# Altium PCB SThuMb32.PcbDoc
Units mm, origin at the board's own origin, x right, y up, seen from the top; angles counter-clockwise.
Board outline 40.36 x 22.86 mm, 4 copper layers (Top Layer, GND, PWR, Bottom Layer), stack 0.603 mm thick; 23 components, 43 nets, 126 pads, 29 vias.
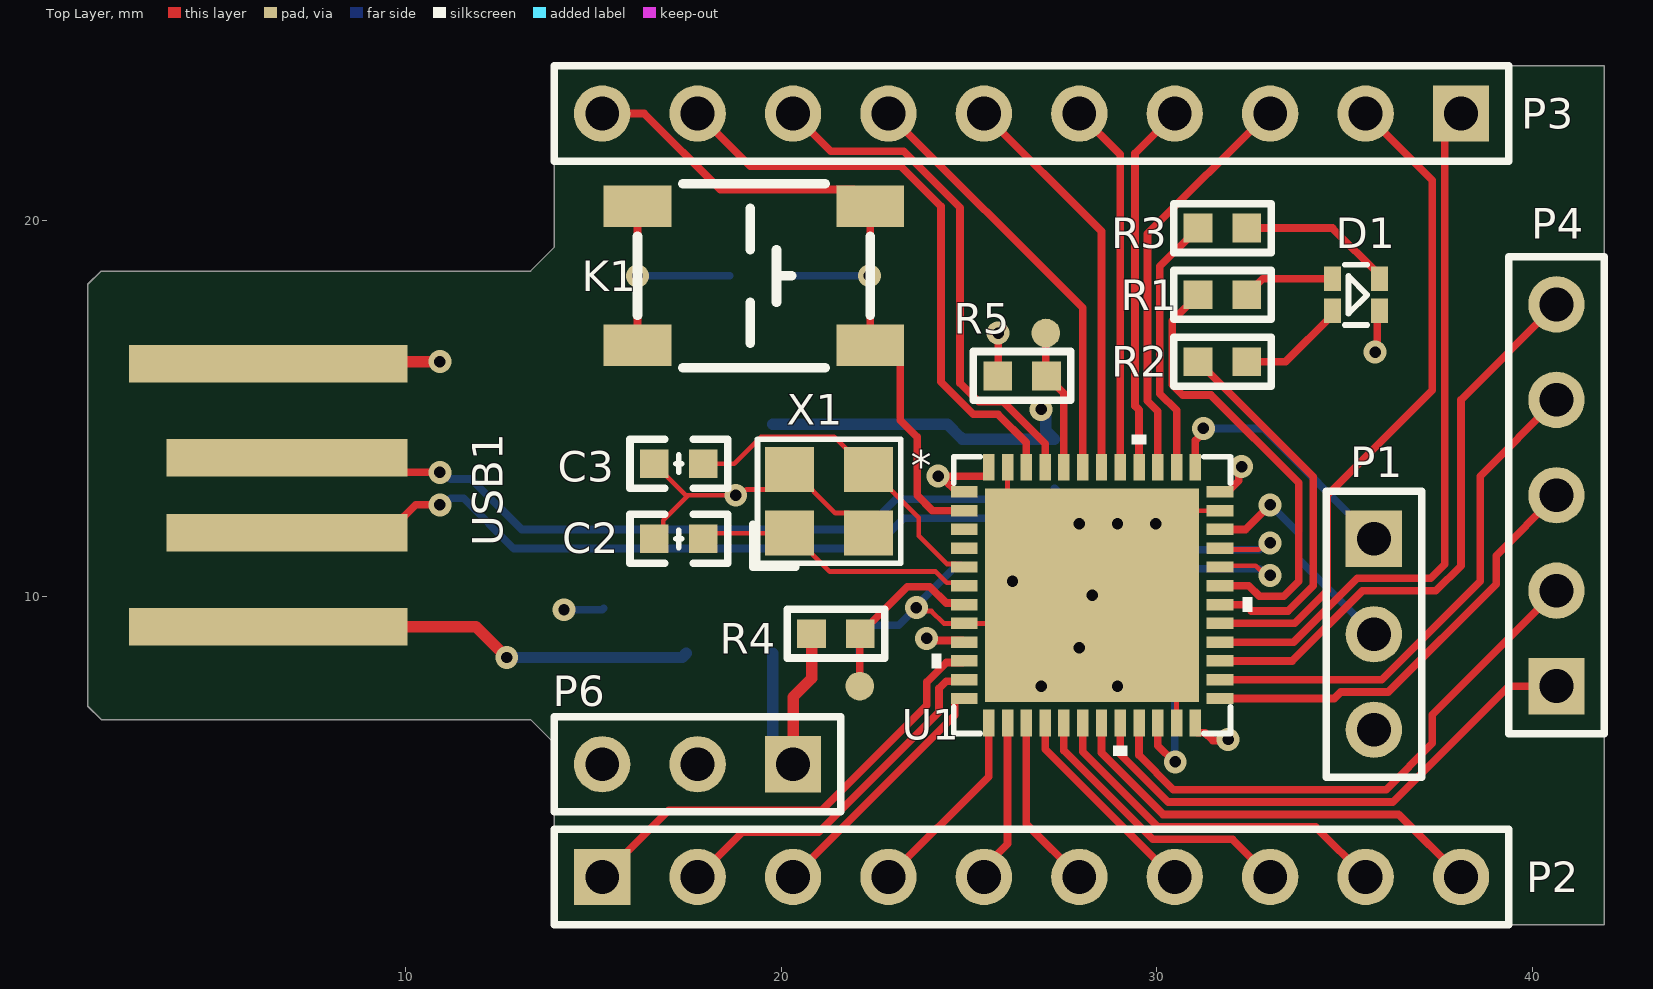
[diagram p0: Top Layer view]
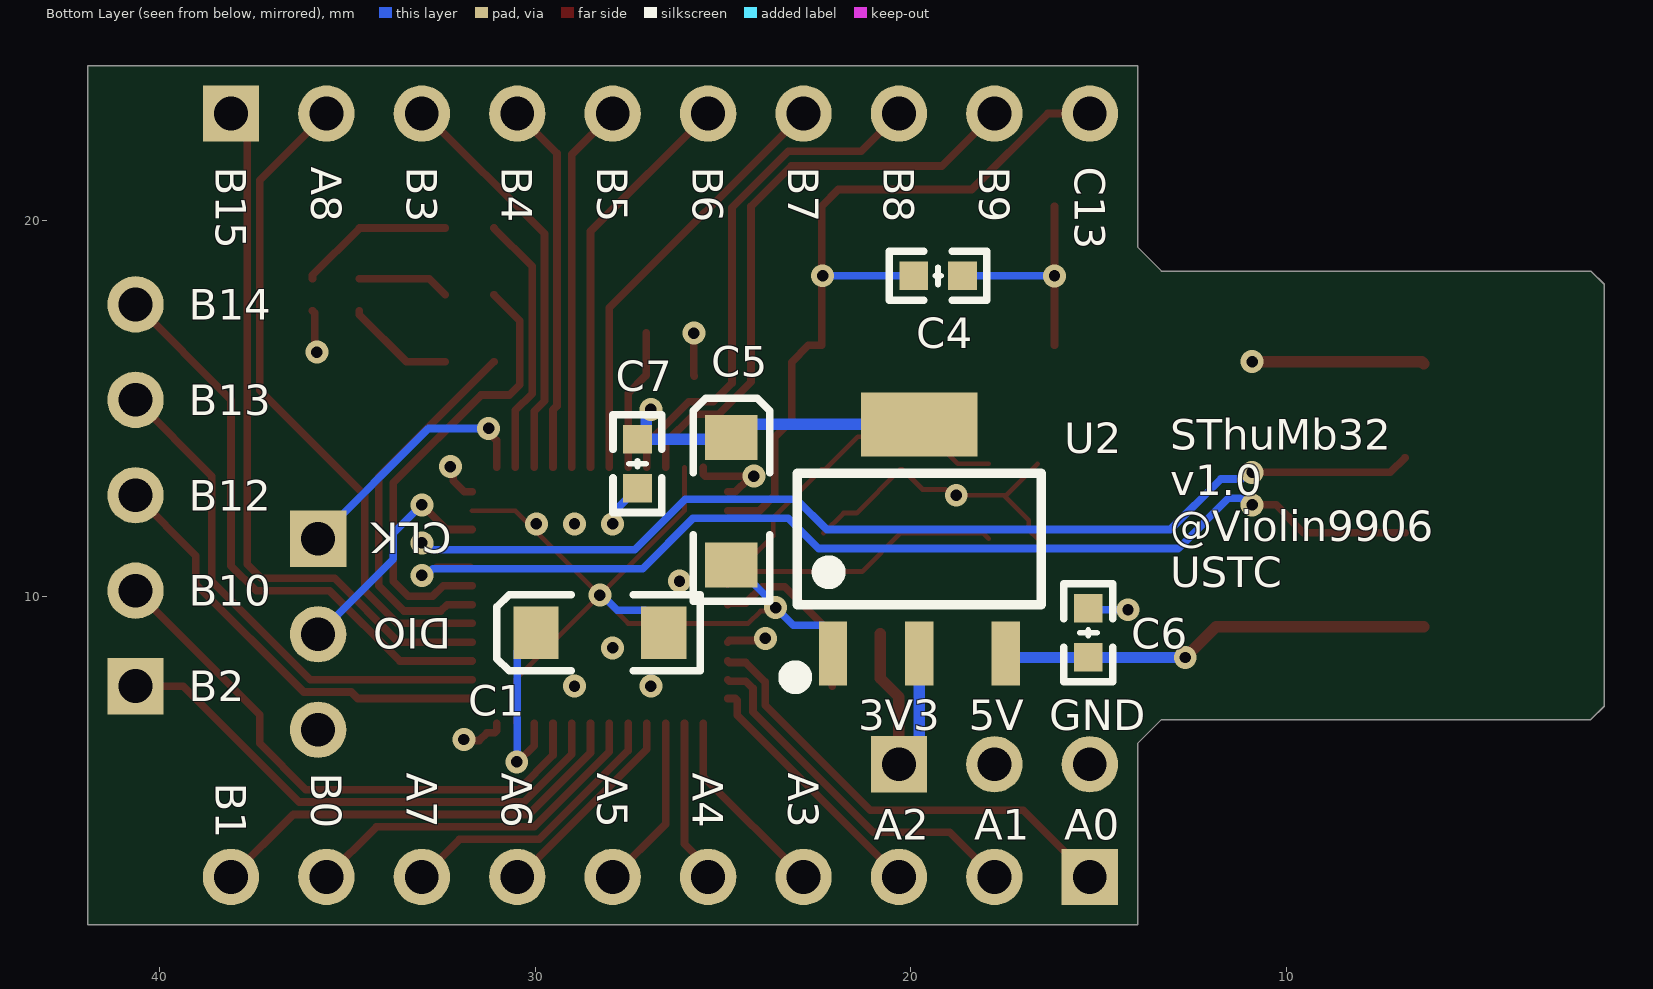
[diagram p1: Bottom Layer view, seen from below]
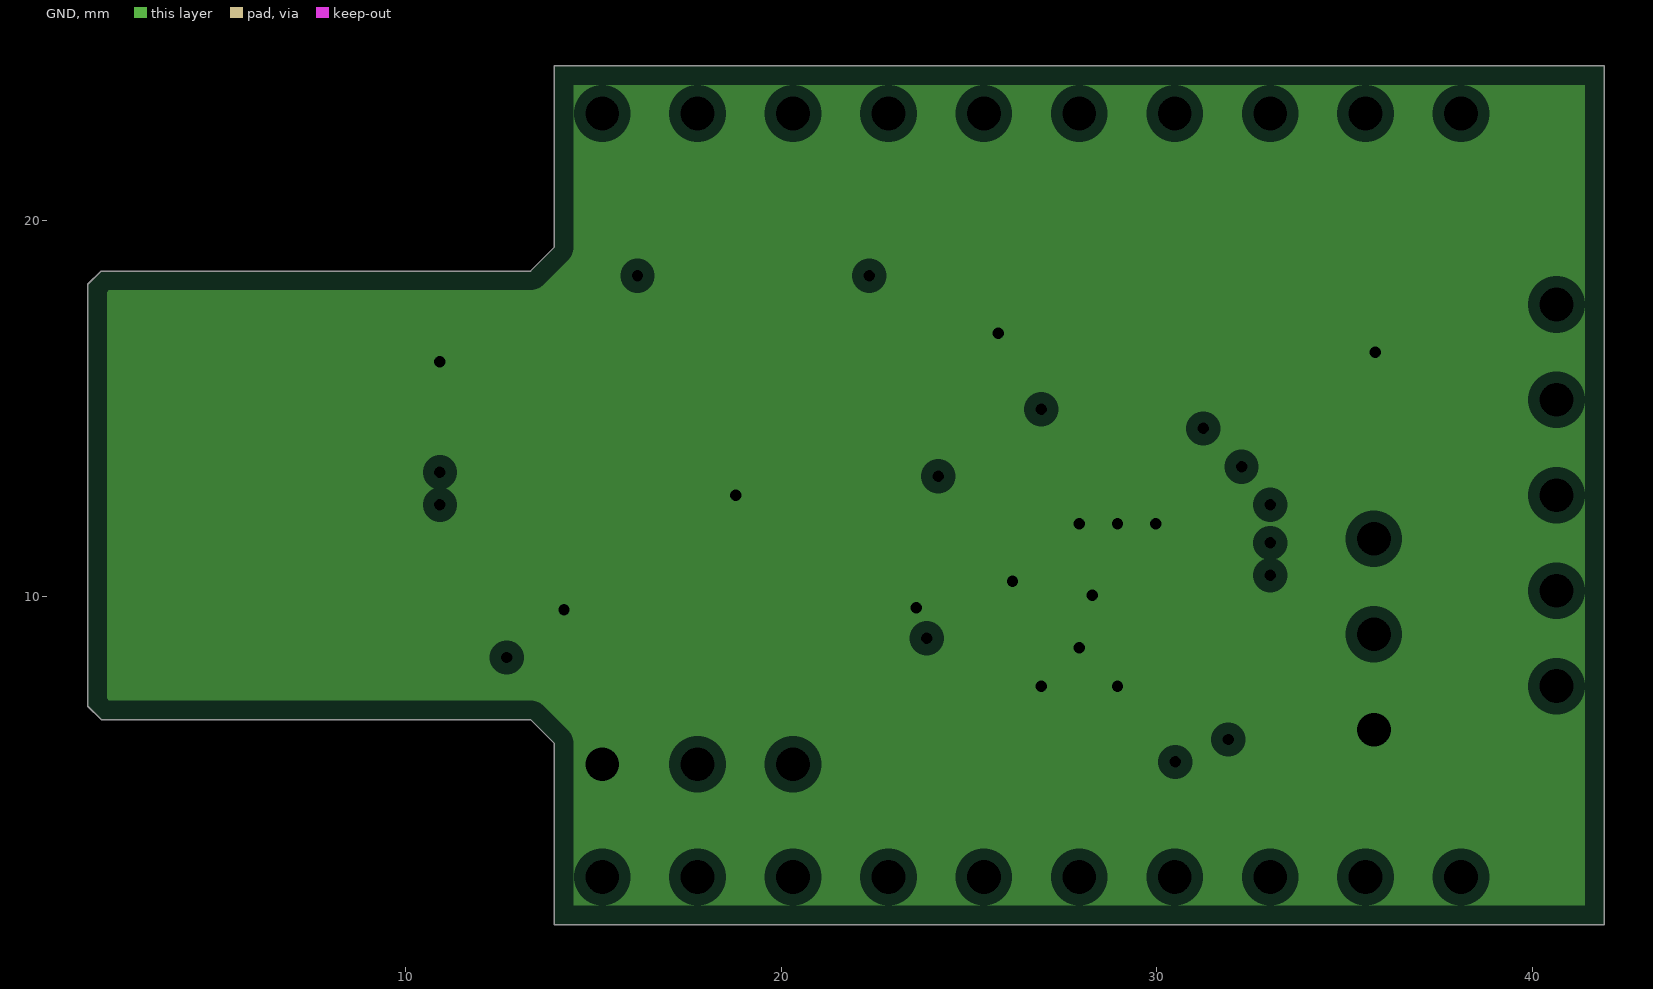
[diagram p2: GND, clearances drawn from the general rule]
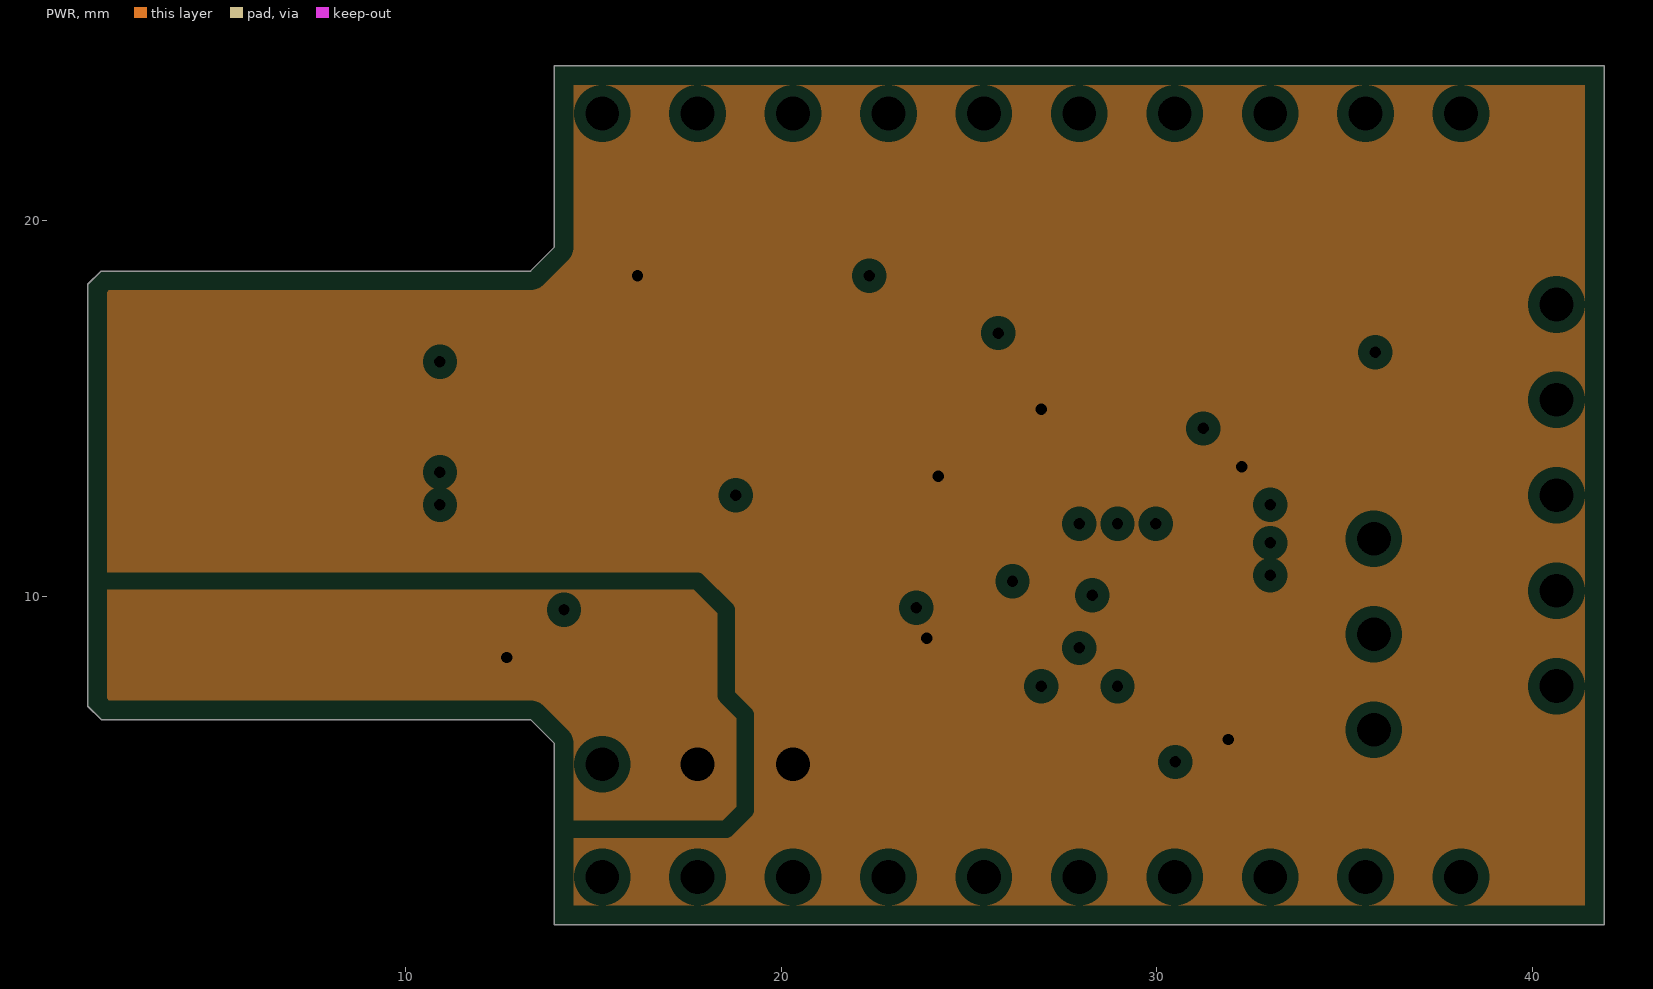
[diagram p3: PWR, clearances drawn from the general rule]
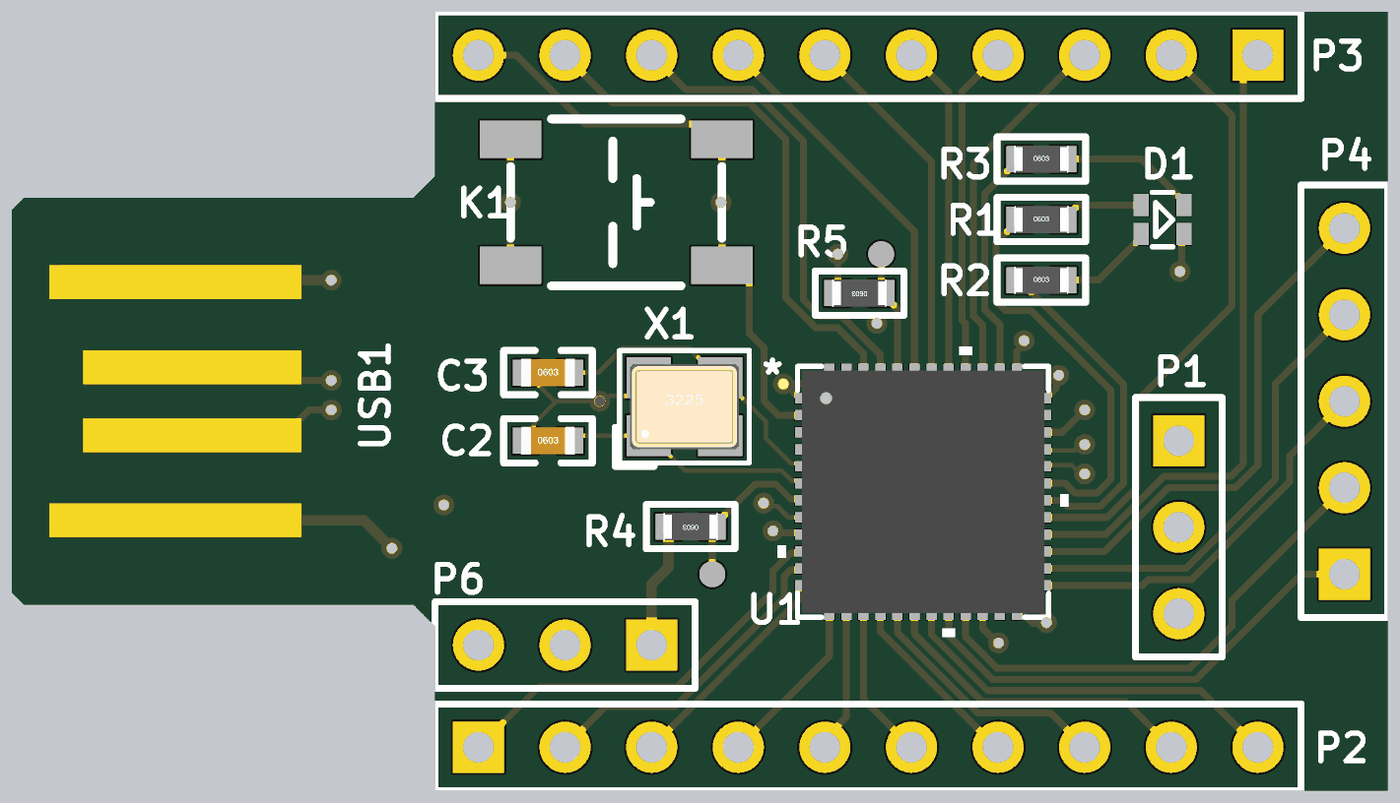
[diagram p4: 3D render of the assembled board from above, using the file's embedded part models]
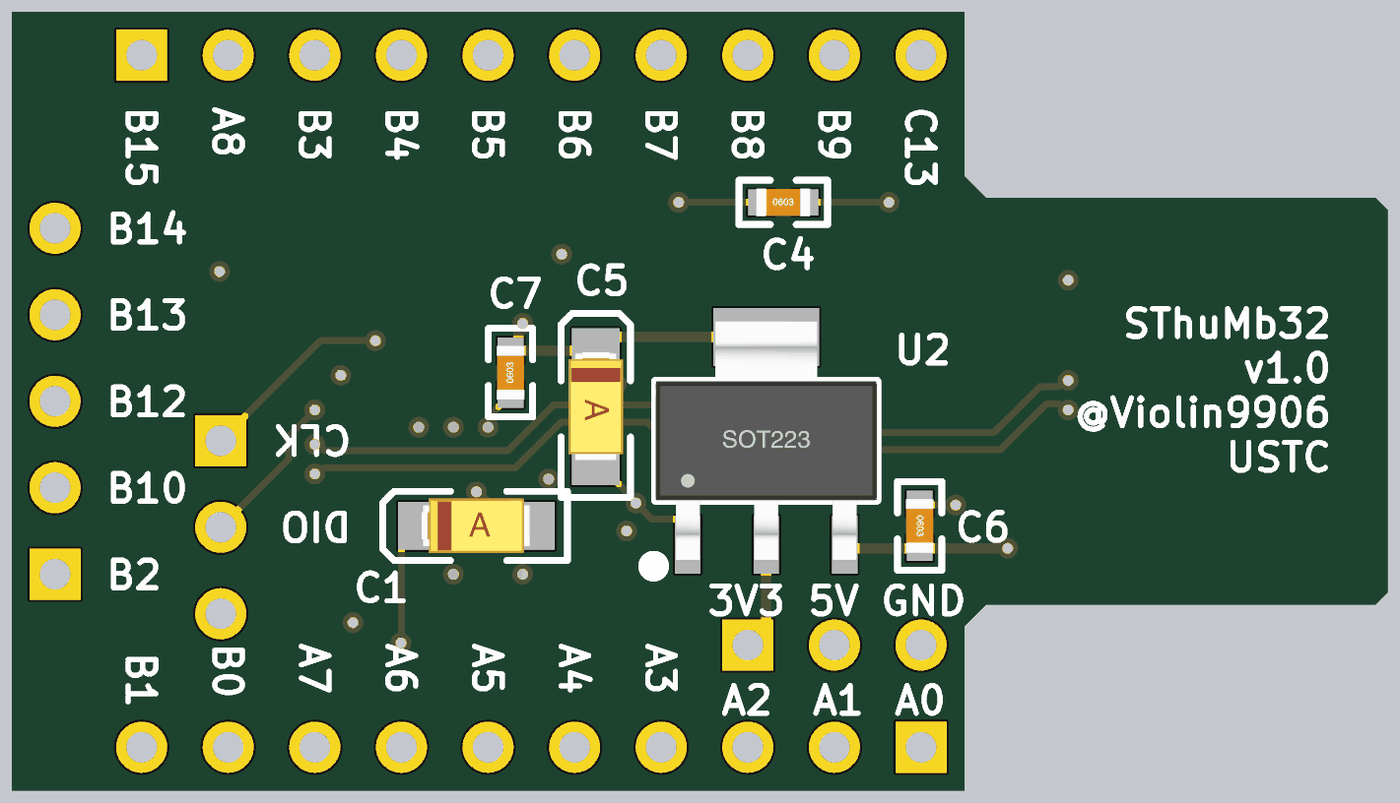
[diagram p5: 3D render of the assembled board from below, using the file's embedded part models]

## Layer stack, top to bottom
Top Solder: solder mask 0.0102, Solder Resist, Dk 3.5
Top Layer: signal copper 0.0356
Dielectric 2: prepreg 0.0711, PP-006, Dk 4.1
GND: plane copper 0.035, net GND
Dielectric 1: dielectric 0.32, FR-4, Dk 4.8
PWR: plane copper 0.035, net (Multiple Nets)
Dielectric 3: prepreg 0.0711, PP-006, Dk 4.1
Bottom Layer: signal copper 0.0356
Bottom Solder: solder mask 0.0102, Solder Resist, Dk 3.5

## Board outline
1.55,7.086 1.55,18.314 1.905,18.669 13.335,18.669 13.97,19.304 13.97,24.13 41.91,24.13 41.91,1.27 13.97,1.27 13.97,6.096 13.335,6.731 1.905,6.731

## Design rules (kind name [scope] priority, off if disabled: settings)
BoardOutlineClearance [All] p1: gap=0.2 ignorepadtopadclearanceinfootprint=FALSE
Clearance [All] p1: gap=0.254 ignorepadtopadclearanceinfootprint=TRUE except(0.127: Arc-Arc Arc-Track Track-Track; 0.152: Arc-THPad Arc-Via Track-THPad Track-Via SMDPad-Via THPad-THPad THPad-Via Via-Via Via-Fill Via-Poly Via-Region; 0.203: Arc-SMDPad Track-SMDPad SMDPad-SMDPad SMDPad-THPad SMDPad-Text; 0.508: Fill-Text Poly-Text Region-Text)
DiffPairsRouting [All] p1: maxlimit=0.305 minlimit=0.254 mostfreqgap=0.305 toplayer_minwidth=0.127 toplayer_maxwidth=0.381 toplayer_prefwidth=0.203 bottomlayer_minwidth=0.127 bottomlayer_maxwidth=0.381 bottomlayer_prefwidth=0.203 maxuncoupledlength=12.7
HoleToHoleClearance [All] p1: gap=0.305 allowstackedmicrovias=TRUE
MinimumSolderMaskSliver [All] p1: minsoldermaskwidth=0.076
PlaneClearance [All] p1: clearance=0.305
PlaneConnect [All] p1: pad.planeconnectstyle=Relief pad.reliefexpansion=0.508 pad.reliefentries=4 pad.reliefconductorwidth=0.254 pad.reliefairgap=0.254 via.planeconnectstyle=Direct via.reliefexpansion=0.508 via.reliefentries=4 via.reliefconductorwidth=0.254 via.reliefairgap=0.254
PolygonConnect [All] p1: thpad.connectstyle=Relief thpad.reliefconductorwidth=0.381 thpad.reliefentries=4 thpad.polygonreliefangle="90 Angle" thpad.airgapwidth=0.254 smdpad.connectstyle=Relief smdpad.reliefconductorwidth=0.254 smdpad.reliefentries=4 smdpad.polygonreliefangle="90 Angle" smdpad.airgapwidth=0.254 via.connectstyle=Direct via.reliefconductorwidth=0.254 via.reliefentries=4 via.polygonreliefangle="90 Angle" via.airgapwidth=0.254
RoutingVias [All] p1: holewidth=0.305 width=0.61 viastyle="Through Hole" minholewidth=0.305 minwidth=0.61 maxholewidth=0.711 maxwidth=1.27
SilkToSilkClearance [All] p1: silktosilkclearance=0.102
SilkToSolderMaskClearance [IsPad] p1: minsilkscreentomaskgap=0.089 clearancetoexposedcopper=TRUE
SolderMaskExpansion [All] p1: expansion=0.064 istentingtop=FALSE
UnRoutedNet [All] p1: checkbadconnections=TRUE
Width [All] p1: maxlimit=0.305 minlimit=0.127 preferedwidth=0.254
22 further rules are at their usual default settings.

## Classes and differential pairs
differential pair USB: +USB_P -USB_N

## Components (designator, comment, footprint, x,y, rotation, side; value= is the part's Value field where it differs from the comment)
C1 "4.7uF" "CD A(3216)" 28.28,9.04 r180 bottom
C2 "22pF" "C 0603_L" 17.28,11.54 r0 top
C3 "22pF" "C 0603_L" 17.28,13.54 r0 top
C4 "100nF" "C 0603_L" 19.28,18.54 r180 bottom
C5 "10uF" "CD A(3216)" 24.78,12.54 r270 bottom
C6 "2.2uF" "C 0603_L" 15.28,9.04 r270 bottom
C7 "100nF" "C 0603_L" 27.28,13.54 r90 bottom
D1 "LED_RGB" LED_RGB_0606 35.306,18.034 r180 top
K1 "Key" KEY_4X4_4P 19.28,18.54 r180 top
P1 "Header 3" HDR1X3 35.78,11.54 r270 top
P2 "Header 10" HDR1X10 15.24,2.54 r0 top
P3 "Header 10" HDR1X10 38.1,22.86 r180 top
P4 "Header 5" HDR1X5 40.64,7.62 r90 top
P6 "Header 3" HDR1X3 20.32,5.54 r180 top
R1 "4.7K" "R 0603_L" 31.75,18.034 r0 top
R2 "10K" "R 0603_L" 31.75,16.256 r0 top
R3 "4.7K" "R 0603_L" 31.75,19.812 r0 top
R4 "100K" "R 0603_L" 21.463,9.017 r180 top
R5 "100K" "R 0603_L" 26.416,15.875 r180 top
U1 "STM32F401CE" UFQFPN-48_7X7_L 28.28,10.04 r0 top value=Value
U2 "AMS1117-3V3" SOT223_L 19.78,11.54 r180 bottom
USB1 "USB_4P" USB_A_MALE 6.35,12.7 r90 top
X1 "25MHz" "OSC 3225-4P" 21.28,12.54 r0 top

## Footprints (in the part's own frame and the unit in brackets; to place one, negate y for a bottom-side part, rotate by r counter-clockwise, add the part's x,y. Pads: shape width x height; smd on the part's side, far side on the other; paste and mask are expansions set on the pad)
"C 0603_L" [mil] "无极性贴片电容                                       淘宝ID:黄晶宝石"
  rect 30x30 smd: 1(-25.59,0) 2(25.59,0)
  silkscreen extent -51,-26 51,26, body extent -31,-16 31,16, height 32
"CD A(3216)" [mm] "长3.2mm，宽1.6mm，厚1.6mm      淘宝ID:黄晶宝石"
  rect 1.2x1.4 smd: 1(-1.7,0) 2(1.7,0)
  silkscreen extent -2.74,-1.02 2.67,1.02, body extent -1.6,-0.8 1.6,0.8, height 1.6
HDR1X3 [mm] "Connector; Header; 3 Position"
  rect 1.5x1.5 hole 0.9: 1(0,0)
  round 1.5 hole 0.9: 2(2.54,0) 3(5.08,0)
  silkscreen extent -1.27,-1.27 6.35,1.27
HDR1X5 [mm] "Connector; Header; 5 Position"
  rect 1.5x1.5 hole 0.9: 1(0,0)
  round 1.5 hole 0.9: 2(2.54,0) 3(5.08,0) 4(7.62,0) 5(10.16,0)
  silkscreen extent -1.27,-1.27 11.43,1.27
HDR1X10 [mm] "Connector; Header; 10 Position"
  rect 1.5x1.5 hole 0.9: 1(0,0)
  round 1.5 hole 0.9: 2(2.54,0) 3(5.08,0) 4(7.62,0) 5(10.16,0) 6(12.7,0) 7(15.24,0) 8(17.78,0) 9(20.32,0) 10(22.86,0)
  silkscreen extent -1.27,-1.27 24.13,1.27
KEY_4X4_4P [mm]
  rect 1.8x1.1 smd: 1(-3.1,1.85) 2(3.1,1.85) 3(-3.1,-1.85) 4(3.1,-1.85)
  silkscreen extent -3.1,-2.45 3.1,2.45
LED_RGB_0606 [mm]
  rect 0.45x0.65 smd mask+0.025: 1(-0.625,0.425) 2(0.625,0.425) 3(-0.625,-0.425) 4(0.625,-0.425)
  silkscreen extent -0.3,-0.8 0.3,0.8, body extent -0.65,-0.7 0.65,0.7, height 0.6
"OSC 3225-4P" [mm] "3.2*2.5*0.7mm(长宽高)                         淘宝ID:黄晶宝石"
  rect 1.3x1.2 smd: 1(-1.05,-0.85) 2(1.05,-0.85) 3(1.05,0.85) 4(-1.05,0.85)
  silkscreen extent -2.03,-1.75 1.91,1.65, body extent -1.6,-1.25 1.6,1.25, height 0.7
"R 0603_L" [mil] "1/10W贴片电阻                 淘宝ID:黄晶宝石"
  rect 30x30 smd: 1(-25.59,0) 2(25.59,0)
  silkscreen extent -51,-26 51,26, body extent -31,-16 32,16, height 16
SOT223_L [mm] "6.4x7x1.6mm(长宽高)"
  rect 0.75x1.7 smd: 1(-2.3,-3.048) 2(0,-3.048) 3(2.3,-3.048)
  rect 3.1x1.7 smd: 2(0,3.048)
  silkscreen extent -3.5,-3.88 3.25,1.75, body extent -3.25,-3.51 3.25,3.51, height 1.65
UFQFPN-48_7X7_L [mil]
  rect 28x12 smd mask+1: 1(-134,108.27) 2(-134,88.58) 3(-134,68.9) 4(-134,49.21) 5(-134,29.53) 6(-134,9.84) 7(-134,-9.84) 8(-134,-29.53) 9(-134,-49.21) 10(-134,-68.9) 11(-134,-88.58) 12(-134,-108.27) 25(134,-108.27) 26(134,-88.58) 27(134,-68.9) 28(134,-49.21) 29(134,-29.53) 30(134,-9.84) 31(134,9.84) 32(134,29.53) 33(134,49.21) 34(134,68.9) 35(134,88.58) 36(134,108.27)
  rect 12x28 smd mask+1: 13(-108.27,-134) 14(-88.58,-134) 15(-68.9,-134) 16(-49.21,-134) 17(-29.53,-134) 18(-9.84,-134) 19(9.84,-134) 20(29.53,-134) 21(49.21,-134) 22(68.9,-134) 23(88.58,-134) 24(108.27,-134) 37(108.27,134) 38(88.58,134) 39(68.9,134) 40(49.21,134) 41(29.53,134) 42(9.84,134) 43(-9.84,134) 44(-29.53,134) 45(-49.21,134) 46(-68.9,134) 47(-88.58,134) 48(-108.27,134)
  rect 224x224 smd paste-111.5 mask+1: 49(0,0)
  silkscreen extent -168,-168 168,168, body extent -140,-140 140,140, height 24
USB_A_MALE [mm]
  rect 1x7.41 smd paste-100 mask+0: 1(-3.5,0) 4(3.5,0)
  rect 1x6.41 smd paste-100 mask+0: 2(-1,-0.5) 3(1,-0.5)

## Part data
C1 C5: library part CT, "贴片钽电容", BOM名称=贴片钽电容, 淘宝ID="封装库来自淘宝 ID：黄晶宝石", 联系售后=https://shop463601444.taobao.com
C2 C3 C4 C6 C7: library part C, "贴片电容", BOM名称=无极性贴片电容, 唯一出售店铺网址=https://shop463601444.taobao.com, 淘宝ID="封装库来自淘宝 ID：黄晶宝石", 联系售后，技术支持=https://shop463601444.taobao.com
K1: library part Key_4P
P1 P6: "Header, 3-Pin", LatestRevisionDate=17-Jul-2002, LatestRevisionNote="Re-released for DXP Platform.", Publisher="Altium Limited"
P2 P3: "Header, 10-Pin", LatestRevisionDate=17-Jul-2002, LatestRevisionNote="Re-released for DXP Platform.", Publisher="Altium Limited"
P4: "Header, 5-Pin", LatestRevisionDate=17-Jul-2002, LatestRevisionNote="Re-released for DXP Platform.", Publisher="Altium Limited"
R1 R2 R3 R4 R5: library part R, "贴片电阻", BOM名称=贴片电阻, 封装库来自淘宝卖家 ID：黄晶宝石=其他店铺购入均为盗版，不享受售后技术支持服务，请立即申请退款, 版权归属="来自淘宝 ID：黄晶宝石", 联系售后=https://shop463601444.taobao.com
U1: "带DSP和FPU的高性能基本型系列ARM Cortex-M4 MCU，具有512 KB Flash、84 MHz CPU和ART加速器", Manufacturer_Part_Number=stm32f4xxc1, Copyright="Copyright (C) 2016 Accelerated Designs. All rights reserved", RefDes=RefDes, Type=DEV, Vendor=STMicroelectronics
U2: library part AMS1117, "三端稳压芯片", BOM名称=稳压芯片, 欢迎光临淘宝店铺=https://shop463601444.taobao.com, 淘宝ID="封装库来自淘宝 ID：黄晶宝石"
X1: library part XTAL-4P, "4脚无源晶振", BOM名称=4脚无源晶振, 学习资源=https://shop463601444.taobao.com, 版权归属="封装库来自淘宝卖家 ID：黄晶宝石"

## Free pads (board coordinates)
  round 0.762 smd: ""(22.098,7.62) ""(27.051,17.018)

## Via types
v1: diameter 0.61, hole 0.305, Top Layer to Bottom Layer, tented both sides, 29 vias

## Nets (pads, with @x,y where several pads share a name; then routed paths per layer and width w, separated by ;. In a path a pad name is that pad's centre, name@x,y a point inside that pad or via, vN(x,y) a via of type N, cw(c..) or ccw(c..) an arc to the next point about the centre after c; other vN are vias at no path point)
+5: C6.2 P6.2 U2.3 USB1.1 | length 11.5
  Top Layer w0.305: USB1.1 11.882,9.2 v1(12.7,8.382)
  Bottom Layer w0.305: v1(12.7,8.382) 17.37,8.382 U2.3
A0: P2.1 U1.10 | length 12.4
  Top Layer w0.203: P2.1 17.018,4.318 21.082,4.318 23.876,7.112 23.876,7.729 24.395,8.247 24.834,8.247 U1.10
A1: P2.2 U1.11 | length 9.6
  Top Layer w0.203: P2.2 18.974,3.734 21.006,3.734 24.206,6.934 24.206,7.559 24.395,7.747 24.834,7.747 U1.11
A2: P2.3 U1.12 | length 6.8
  Top Layer w0.203: P2.3 24.622,6.842 24.622,7.239 24.673,7.29 U1.12
A3: P2.4 U1.13 | length 5.2
  Top Layer w0.203: P2.4 25.53,5.21 U1.13
A4: P2.5 U1.14 | length 4.4
  Top Layer w0.203: P2.5 25.4,2.794 26.03,3.424 U1.14
A5: P2.6 U1.15 | length 4.7
  Top Layer w0.203: U1.15 26.53,3.95 P2.6
A6: P2.7 U1.16 | length 5.6
  Top Layer w0.203: U1.16 27.03,5.941 30.431,2.54 P2.7
A7: P2.8 U1.17 | length 7.6
  Top Layer w0.203: U1.17 27.53,5.908 29.894,3.544 32.016,3.544 P2.8
A8: P3.2 U1.29 | length 17.8
  Top Layer w0.203: U1.29 33.674,9.29 34.544,10.16 34.544,12.7 37.338,15.494 37.338,21.082 P3.2
B0: P2.9 U1.18 | length 9.7
  Top Layer w0.203: U1.18 28.03,5.875 30.031,3.874 34.226,3.874 P2.9
B1: P2.10 U1.19 | length 11.7
  Top Layer w0.203: U1.19 28.53,5.842 30.168,4.204 36.436,4.204 P2.10
B2: P4.1 U1.20 | length 14.2
  Top Layer w0.203: U1.20 29.03,5.809 30.304,4.535 36.285,4.535 39.37,7.62 P4.1
B3: P3.3 U1.39 | length 10.9
  Top Layer w0.203: U1.39 30.03,14.936 29.754,15.212 29.754,19.659 32.955,22.86 P3.3
B4: P3.4 U1.40 | length 9.9
  Top Layer w0.203: U1.40 29.53,14.969 29.424,15.076 29.424,21.804 P3.4
B5: P3.5 U1.41 | length 9.9
  Top Layer w0.203: P3.5 29.03,21.77 U1.41
B6: P3.6 U1.42 | length 10.7
  Top Layer w0.203: P3.6 28.53,19.73 U1.42
B7: P3.7 U1.43 | length 11.6
  Top Layer w0.203: P3.7 28.03,17.69 U1.43
B8: P3.8 U1.45 | length 13.7
  Top Layer w0.203: P3.8 21.324,21.856 23.262,21.856 24.765,20.353 24.765,15.683 25.259,15.189 25.912,15.189 27.03,14.071 U1.45
B9: P3.9 U1.46 | length 15.8
  Top Layer w0.203: P3.9 19.177,21.463 23.188,21.463 24.257,20.394 24.257,15.724 25.122,14.859 25.775,14.859 26.53,14.104 U1.46
B10: P4.2 U1.21 | length 15
  Top Layer w0.203: U1.21 29.53,5.776 30.441,4.865 36.107,4.865 37.338,6.096 37.338,6.858 P4.2
B12: P4.3 U1.25 | length 11.6
  Top Layer w0.203: U1.25 34.722,7.29 34.896,7.464 36.166,7.464 39.035,10.333 39.035,11.095 P4.3
B13: P4.4 U1.26 | length 13.7
  Top Layer w0.203: U1.26 33.964,7.79 33.968,7.794 35.994,7.794 38.608,10.408 38.608,13.208 P4.4
B14: P4.5 U1.27 | length 15.5
  Top Layer w0.203: U1.27 33.608,8.29 35.478,10.16 37.432,10.16 38.1,10.828 38.1,15.24 P4.5
B15: P3.1 U1.28 | length 19
  Top Layer w0.203: U1.28 33.641,8.79 35.341,10.49 37.295,10.49 37.668,10.863 37.668,22.428 P3.1
BT0: pad.@27.051,17.018 R5.1 U1.44 | length 3.8
  Top Layer w0.203: pad.@27.051,17.018 27.051,15.89 R5.1 27.53,15.411 U1.44
BTN: C4.1 K1.1 K1.3 P3.10 U1.2 | length 20.7
  Top Layer w0.203: P3.10 16.36,22.86 18.382,20.838 21.932,20.838 K1.3 v1@22.38,18.795 ; v1(22.352,18.542) 22.352,18.767 v1@22.38,18.795 ; U1.2 24.032,12.29 23.622,12.7 23.622,14.249 23.178,14.693 23.178,16.242 22.73,16.69 K1.1 v1@22.38,18.795
  Bottom Layer w0.203: C4.1 22.35,18.54 v1(22.352,18.542)
GND: C1.2 C2.1 C3.1 C5.2 C6.1 C7.1 D1.1 P1.3 P6.3 R5.2 U1.8 U1.23 U1.35 U1.47 U1.49 U2.1 USB1.4 X1.2 X1.4 | length 42.1
  Top Layer w0.127: C2.1 16.863,11.773 16.863,12.037 17.526,12.7 ; C3.1 17.47,12.7 v1(18.796,12.7) 18.927,12.7 19.08,12.853 19.693,12.853 X1.4 20.28,13.39 21.443,12.227 21.793,12.227 X1.2 ; v1(23.603,9.709) 23.695,9.617 24.003,9.617 24.33,9.29 U1.8 27.53,9.29 v1(28.28,10.04) ; U1.47 26.03,12.29 v1(28.28,10.04) ; U1.23 30.53,7.79 v1(28.28,10.04) ; U1.35 30.53,12.29 v1(28.28,10.04)
  Top Layer w0.203: R5.2 25.781,15.89 v1(25.781,17.018) ; v1(35.814,16.51) 35.872,16.568 35.872,17.55 D1.1
  Top Layer w0.305: USB1.4 6.406,16.256 v1(10.922,16.256)
  Bottom Layer w0.203: v1(14.224,9.652) 15.242,9.652 C6.1 ; U2.1 22.08,8.967 22.353,9.24 23.134,9.24 v1(23.603,9.709) 23.603,9.763 24.68,10.84 C5.2 ; C1.2 26.58,9.14 27.078,9.638 27.819,9.638 28.221,10.04 v1(28.28,10.04) ; C7.1 27.862,12.308 27.862,12.016 v1(27.94,11.938)
  other v1: 26.924,7.62 28.956,7.62 27.94,8.636 26.162,10.414 28.956,11.938 29.972,11.938
LED_B: R1.1 U1.31 | length 12.1
  Top Layer w0.203: R1.1 30.414,17.348 30.414,15.644 30.692,15.367 31.445,15.367 33.782,13.03 33.782,10.414 33.376,10.008 32.736,10.008 32.453,10.29 U1.31
LED_G: R3.1 U1.38 | length 7
  Top Layer w0.203: U1.38 30.53,14.957 30.084,15.404 30.084,18.796 R3.1
LED_R: R2.1 U1.30 | length 10.1
  Top Layer w0.203: R2.1 34.163,13.193 34.163,10.287 33.496,9.62 32.512,9.62 32.344,9.788 31.685,9.788 U1.30
NetC1_1: C1.1 U1.22 | length 4.9
  Top Layer w0.203: U1.22 30.03,6.038 30.466,5.602 v1(30.494,5.602)
  Bottom Layer w0.203: C1.1 30.478,8.542 30.478,5.618 v1(30.494,5.602)
NetC2_2: C2.2 U1.6 X1.1 | length 7.6
  Top Layer w0.127: C2.2 18.08,11.69 X1.1 20.28,11.69 21.302,10.668 24.113,10.668 24.41,10.371 24.795,10.371 U1.6
NetC3_2: C3.2 U1.5 X1.3 | length 9
  Top Layer w0.127: C3.2 18.753,13.54 19.47,14.257 21.413,14.257 22.28,13.39 X1.3 22.38,13.39 23.663,12.107 23.663,11.618 24.41,10.871 24.796,10.871 U1.5
NetD1_2: D1.2 R2.2 | length 2.9
  Top Layer w0.203: R2.2 33.428,16.256 34.681,17.509 D1.2
NetD1_3: D1.3 R3.2 | length 4.2
  Top Layer w0.203: R3.2 34.678,19.812 35.931,18.559 D1.3
NetD1_4: D1.4 R1.2 | length 2.5
  Top Layer w0.203: R1.2 32.825,18.459 D1.4
RST: pad.@22.098,7.62 R4.1 U1.7 | length 4.9
  Top Layer w0.203: pad.@22.098,7.62 22.098,9.002 R4.1 23.364,10.268 23.959,10.268 24.395,9.833 24.834,9.833 U1.7
SWCLK: P1.1 U1.37 | length 6.9
  Top Layer w0.203: U1.37 31.03,14.156 31.242,14.368 v1(31.242,14.478)
  Bottom Layer w0.203: v1(31.242,14.478) 32.842,14.478 P1.1
SWDIO: P1.2 U1.34 | length 6.2
  Top Layer w0.203: U1.34 32.364,11.79 v1(33.02,12.446)
  Bottom Layer w0.203: v1(33.02,12.446) 33.782,11.684 33.782,10.998 P1.2
USB_N: U1.32 USB1.2 | length 29.5
  Top Layer w0.127: U1.32 31.718,10.824 32.632,10.824 32.889,10.566 v1(33.02,10.566)
  Top Layer w0.203: USB1.2 9.555,11.7 9.953,12.098 9.953,12.124 10.276,12.446 v1(10.922,12.446)
  Bottom Layer w0.203: v1(10.922,12.446) 11.032,12.446 11.21,12.624 11.55,12.624 12.892,11.281 22.457,11.281 23.263,12.087 25.803,12.087 27.145,10.744 32.732,10.744 32.91,10.566 v1(33.02,10.566)
USB_P: U1.33 USB1.3 | length 29.3
  Top Layer w0.127: U1.33 31.718,11.256 32.715,11.256 32.889,11.43 v1(33.02,11.43)
  Top Layer w0.203: USB1.3 7.24,13.31 v1(10.922,13.31)
  Bottom Layer w0.203: v1(10.922,13.31) 11.032,13.31 11.21,13.132 11.76,13.132 13.103,11.789 22.247,11.789 23.052,12.595 26.013,12.595 27.356,11.252 32.732,11.252 32.91,11.43 v1(33.02,11.43)
VCC: C4.2 C5.1 C7.2 K1.2 K1.4 P6.1 R4.2 U1.1 U1.9 U1.24 U1.36 U1.48 U2.2 | length 27.4
  Top Layer w0.203: K1.2 v1(16.18,18.54) K1.4 ; v1(23.876,8.89) 23.933,8.833 24.834,8.833 U1.9 ; U1.1 24.673,12.79 24.333,13.13 24.208,13.13 24.13,13.208 25.479,13.208 25.53,13.259 U1.48 ; U1.24 31.03,6.433 31.081,6.382 31.284,6.382 31.493,6.174 31.876,6.174 v1(31.901,6.199) ; U1.36 31.887,12.79 32.18,13.083 32.18,13.384 v1(32.258,13.462)
  Top Layer w0.305: P6.1 20.32,7.331 20.813,7.824 R4.2
  Bottom Layer w0.203: v1(16.18,18.54) C4.2
  Bottom Layer w0.305: U2.2@19.78,8.492 19.78,6.08 P6.1 ; U2.2@19.78,14.588 24.432,14.588 C5.1 24.83,14.19 C7.2 27.051,14.419 27.051,14.776 26.924,14.904 v1(26.924,14.986)
  other v1: 24.181,13.208
pads on no net: U1.3 U1.4

## Polygon pours and split planes (outlines as drawn)
GND on GND (split plane): 41.4,1.78 14.48,1.78 14.48,6.096 14.471,6.196 14.442,6.291 14.394,6.38 14.331,6.457 13.696,7.092 13.619,7.155 13.53,7.203 13.435,7.232 13.335,7.241 2.116,7.241 2.06,7.297 2.06,18.103 2.116,18.159 13.335,18.159 13.435,18.168 13.53,18.197 13.619,18.245 13.696,18.308 14.331,18.943 14.394,19.02 14.442,19.109 14.471,19.204 14.48,19.304 14.48,23.62 41.4,23.62
+5 on PWR (split plane): 18.311,9.556 18.311,7.366 18.319,7.306 18.342,7.251 18.379,7.203 18.819,6.762 18.819,4.414 18.446,4.041 14.48,4.041 14.48,6.096 14.471,6.196 14.442,6.291 14.394,6.38 14.331,6.457 13.696,7.092 13.619,7.155 13.53,7.203 13.435,7.232 13.335,7.241 2.116,7.241 2.06,7.297 2.06,10.183 17.684,10.183
VCC on PWR (split plane): 41.4,1.78 14.48,1.78 14.48,3.579 18.542,3.579 18.602,3.587 18.657,3.61 18.705,3.647 19.213,4.155 19.25,4.203 19.273,4.258 19.281,4.318 19.281,6.858 19.273,6.918 19.25,6.973 19.213,7.021 18.773,7.462 18.773,9.652 18.765,9.712 18.742,9.767 18.705,9.815 17.943,10.577 17.895,10.614 17.84,10.637 17.78,10.645 2.06,10.645 2.06,18.103 2.116,18.159 13.335,18.159 13.435,18.168 13.53,18.197 13.619,18.245 13.696,18.308 14.331,18.943 14.394,19.02 14.442,19.109 14.471,19.204 14.48,19.304 14.48,23.62 41.4,23.62

## Other copper
PWR (plane layer: these items are gaps in the copper):
  lines w0.457: 1.778,10.414 17.78,10.414 18.542,9.652 18.542,7.366 19.05,6.858 19.05,4.318 18.542,3.81 13.97,3.81

## Silkscreen, mask and mechanical layers (free items; w line width, h text height)
Bottom Overlay:
  text "C13" at 15.646,21.438 h0.81 r90
  text "B9" at 18.186,21.438 h0.81 r90
  text "B8" at 20.726,21.438 h0.81 r90
  text "B7" at 23.266,21.438 h0.81 r90
  text "B6" at 25.806,21.438 h0.81 r90
  text "B5" at 28.346,21.438 h0.81 r90
  text "B4" at 30.886,21.438 h0.81 r90
  text "B3" at 33.426,21.438 h0.81 r90
  text "A8" at 35.966,21.438 h0.81 r90
  text "B15" at 38.506,21.438 h0.81 r90
  text "B14" at 39.218,17.374 h0.81
  text "B13" at 39.218,14.834 h0.81
  text "B12" at 39.218,12.294 h0.81
  text "CLK" at 32.225,11.963 h0.81 r180
  text "SThuMb32 / v1.0 / @Violin9906 / USTC" at 13.095,10.257 h0.81
  text "B10" at 39.218,9.754 h0.81
  text "DIO" at 32.233,9.423 h0.81 r180
  text "B2" at 39.218,7.214 h0.81
  text "GND" at 16.323,6.452 h0.81
  text "5V" at 18.457,6.452 h0.81
  text "3V3" at 21.403,6.452 h0.81
  text "A3" at 23.266,5.317 h0.81 r90
  text "A4" at 25.806,5.317 h0.81 r90
  text "A5" at 28.346,5.317 h0.81 r90
  text "A6" at 30.886,5.317 h0.81 r90
  text "A7" at 33.426,5.317 h0.81 r90
  text "B0" at 35.966,5.317 h0.81 r90
  text "B1" at 38.506,5.046 h0.81 r90
  text "A0" at 15.917,3.531 h0.81
  text "A1" at 18.322,3.531 h0.81
  text "A2" at 20.997,3.531 h0.81
Mechanical 1:
  the board outline again, w0.254
Drill Drawing:
  circle w0.254: c56.277,44.852 r0.847
  lines w0.254: 55.43,40.195 57.124,40.195 57.124,41.889 55.43,41.889 55.43,40.195
  lines w0.381: 53.911,39.052 320.131,39.052 ; 53.911,46.672 320.131,46.672 ; 67.904,35.242 67.904,50.482 ; 81.616,35.242 81.616,50.482 ; 109.548,35.242 109.548,50.482 ; 122.397,35.242 122.397,50.482 ; 141.036,35.242 141.036,50.482 ; 179.124,35.242 179.124,50.482 ; 194.107,35.242 194.107,50.482 ; 213.05,35.242 213.05,50.482 ; 229.556,35.242 229.556,50.482 ; 251.241,35.242 251.241,50.482 ; 285.115,35.242 285.115,50.482 ; 53.911,35.242 320.131,35.242 320.131,50.482 53.911,50.482 53.911,35.242
  text "Symbol" at 56.197,47.816 h1.83
  text "Count" at 69.047,47.816 h1.83
  text "Hole Size" at 82.759,47.816 h1.83
  text "Plated" at 110.691,47.816 h1.83
  text "Hole Type" at 123.54,47.816 h1.83
  text "Drill Layer Pair" at 142.179,47.816 h1.83
  text "Via/Pad" at 180.267,47.816 h1.83
  text "Pad Shape" at 195.25,47.816 h1.83
  text "Template" at 214.193,47.816 h1.83
  text "Description" at 230.699,47.816 h1.83
  text "Hole Tolerance (+)" at 252.384,47.816 h1.83
  text "Hole Tolerance (-)" at 286.258,47.816 h1.83
  text "29" at 69.047,44.005 h1.52
  text "12.00mil (0.305mm)" at 82.759,44.005 h1.52
  text "PTH" at 110.691,44.005 h1.52
  text "Round" at 123.54,44.005 h1.52
  text "Top Layer - Bottom Layer" at 142.179,44.005 h1.52
  text "Via" at 180.267,44.005 h1.52
  text "Rounded" at 195.25,44.005 h1.52
  text "(Mixed)" at 214.193,44.005 h1.52
  text "31" at 69.047,40.195 h1.52
  text "35.43mil (0.900mm)" at 82.759,40.195 h1.52
  text "PTH" at 110.691,40.195 h1.52
  text "Round" at 123.54,40.195 h1.52
  text "Top Layer - Bottom Layer" at 142.179,40.195 h1.52
  text "Pad" at 180.267,40.195 h1.52
  text "(Mixed)" at 195.25,40.195 h1.52
  text "(Mixed)" at 214.193,40.195 h1.52
  text "60 Total" at 69.047,36.386 h1.52

## Text inside footprints (layer, text, board x,y; h text height)
U1: Top Overlay "*" at 23.454,13.088 h0.81
USB1: Dimensions "t2.3" at 0.956,7.246 h0.81 r90